# Altium PCB Pollux III.PcbDoc (part 3 of 3)
Units mm, origin at the board's own origin, x right, y up, seen from the top; angles counter-clockwise.
Board outline 123 x 84.5 mm, 4 copper layers (Top Layer, Ground Layer, Source Layer, Bottom Layer), stack 0.742 mm thick; 118 components, 107 nets, 741 pads, 375 vias.
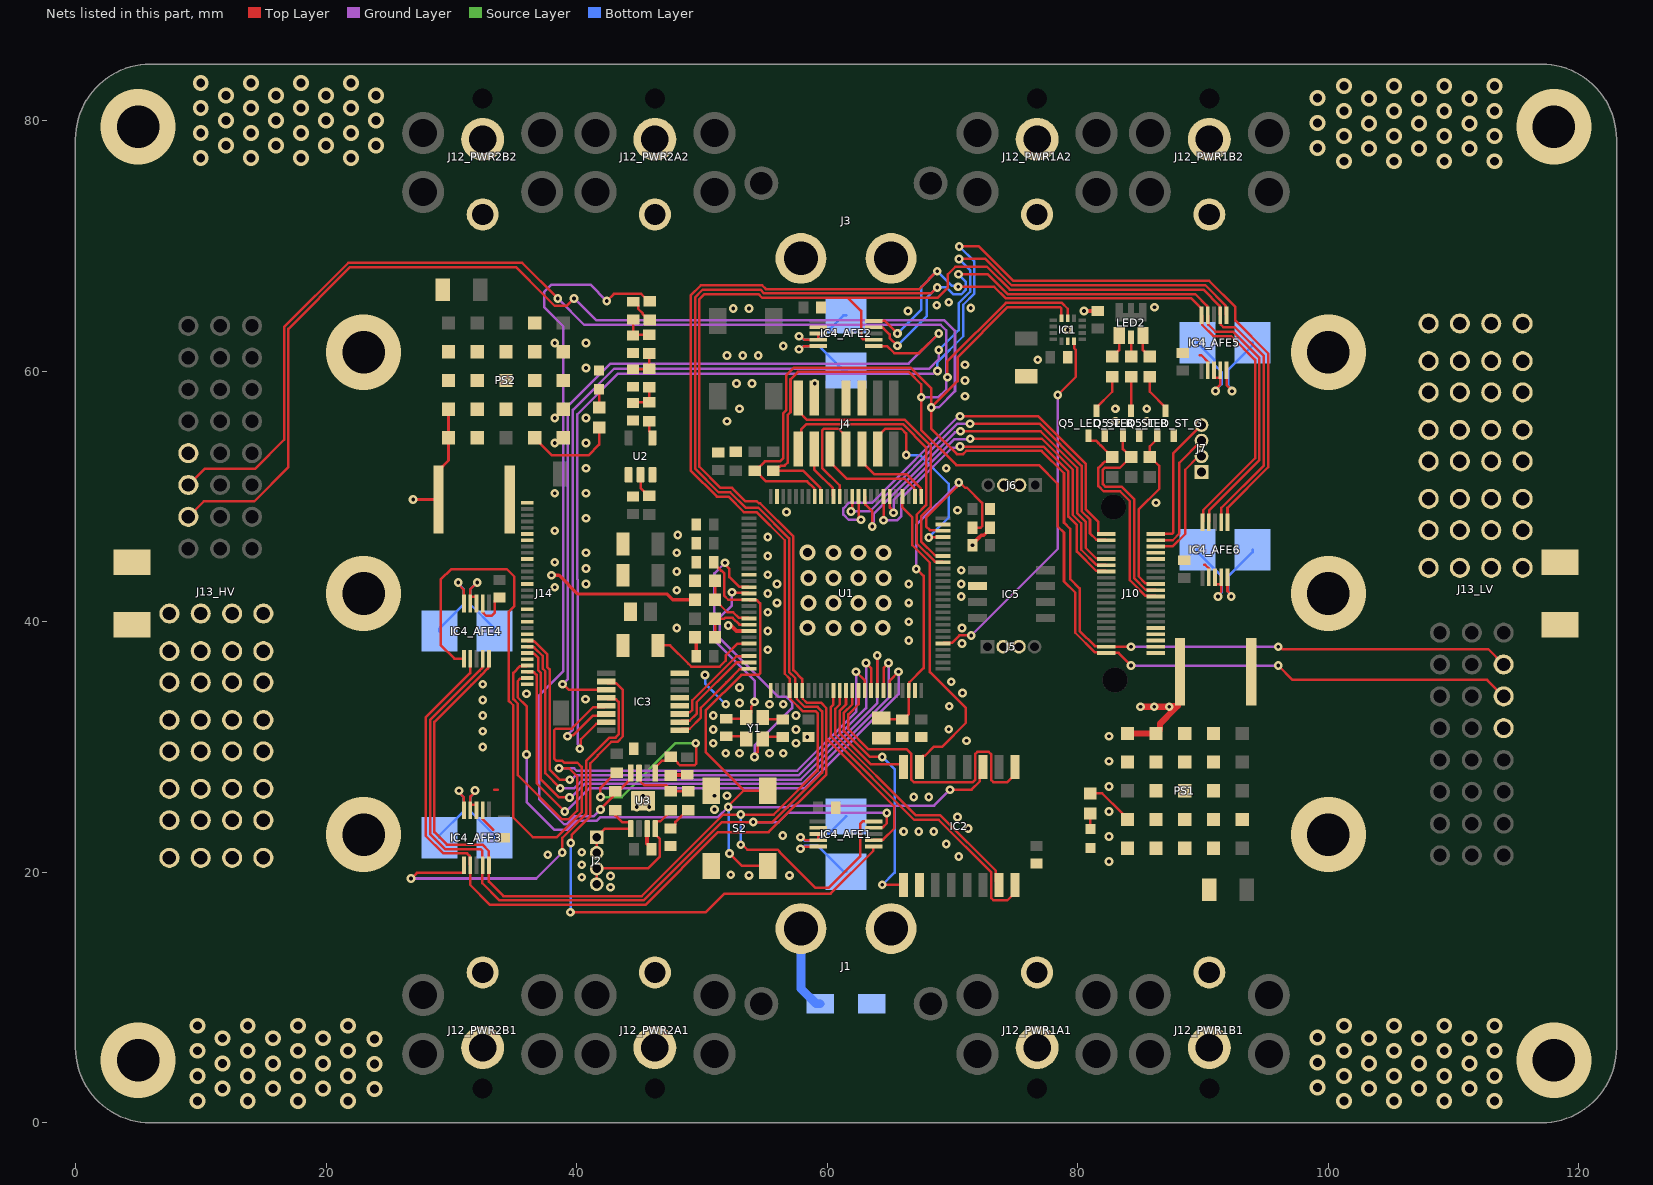
[diagram p4: the nets of this part, all layers, seen from the top]

## Via types
v1: diameter 0.7, hole 0.3, Top Layer to Bottom Layer, 237 vias
v2: diameter 1.27, hole 0.711, Top Layer to Bottom Layer, 128 vias
v3: diameter 6, hole 3.4, Top Layer to Bottom Layer, 10 vias

## Nets (pads, with @x,y where several pads share a name; then routed paths per layer and width w, separated by ;. In a path a pad name is that pad's centre, name@x,y a point inside that pad or via, vN(x,y) a via of type N, cw(c..) or ccw(c..) an arc to the next point about the centre after c; other vN are vias at no path point) (continued)
CAP: C4.1 C5.1 C9.2 U1.48 U1.73 | length 34.6
  Top Layer w0.2: C9.2@64.3,32.3 64.4,32.2 C5.1@66,32.2 ; C5.1@66.1,32.2 66.5,32.6 U1.48@66.5,34.5 66.55,34.55 66.55,35.154 67.696,36.3 67.696,43.65 67.146,44.2 v1(67.1,44.2) ; U1.73@69.25,47.25 69.2,47.3 68.2,47.3 67.9,47.6 67.9,48.306 70.337,50.744 70.337,50.802 70.5,50.965 v1(70.5,51.1) 70.592,51.1 71.006,50.686 71.147,50.686 72.36,49.474 72.36,47.617 72.243,47.5 C4.1@71.6,47.5 C4.1@71.35,47.25
  Ground Layer w0.2: v1(67.1,44.2) 67.1,47.7 v1(70.5,51.1)
CS1: IC3.15 IC4_AFE6.1 | length 115.6
  Top Layer w0.2: v1(40.24,29.86) 40.331,29.95 40.331,30.61 41.571,31.85 42.237,31.85 IC3.15@42.362,31.975 ; v1(70.539,69.95) 72.115,69.95 74.865,67.2 90.495,67.2 92.575,65.12 92.575,64.025 95.2,61.4 95.2,52.33 91.95,49.08 IC4_AFE6.1@91.95,47.95
  Ground Layer w0.2: v1(40.24,29.86) 40.145,29.955 40.145,30.182 40.1,30.227 40.1,43.318 40.05,43.368 40.05,56.55 43.3,59.8 68.465,59.8 68.665,60 v1(68.8,60)
  Bottom Layer w0.2: v1(68.8,60) 68.8,60.726 70.856,62.782 70.856,65.293 71.75,66.187 71.75,68.739 v1(70.539,69.95)
CS2: IC3.14 IC4_AFE5.1 | length 94
  Top Layer w0.2: v1(39.278,30.85) 39.351,30.924 39.724,30.924 41.3,32.5 42.237,32.5 IC3.14@42.362,32.625 ; v1(70.514,68.95) 72.62,68.95 74.72,66.85 90.179,66.85 91.825,65.204 91.825,64.5 IC4_AFE5.1@91.875,64.45
  Ground Layer w0.2: v1(39.278,30.85) 39.278,30.985 39.7,31.407 39.7,56.9 43,60.2 68.15,60.2 68.9,60.95 v1(68.9,61.675)
  Bottom Layer w0.2: v1(68.9,61.675) 70.5,63.275 70.5,65.432 71.4,66.332 71.4,68.064 v1(70.514,68.95)
CS3: IC3.13 IC4_AFE4.1 | length 53.8
  Top Layer w0.2: IC4_AFE4.1@31,37.05 30.25,37.05 29.15,38.15 29.15,43.35 30,44.2 34.425,44.2 35.04,43.585 35.04,41.245 34.6,40.805 34.6,33.666 34.94,33.326 34.94,24.356 36.496,22.8 38.419,22.8 40.4,24.781 40.4,28.4 40.05,28.75 38.999,28.75 38.84,28.909 38.359,28.909 38.2,29.067 38.2,31.333 38.317,31.45 39.601,31.45 41.324,33.173 42.26,33.173 IC3.13@42.362,33.275
CS4: IC3.12 IC4_AFE3.1 | length 33.2
  Top Layer w0.2: v1(26.775,19.5) 26.794,19.5 27.244,19.95 30.95,19.95 31,20 IC4_AFE3.1@31,20.55 ; v1(38.85,21.575) 38.85,22.736 40.75,24.636 40.75,28.884 42.616,30.75 43.103,30.75 43.35,30.996 43.35,33.604 43.153,33.8 42.487,33.8 IC3.12@42.362,33.925
  Ground Layer w0.2: v1(26.775,19.5) 36.775,19.5 v1(38.85,21.575)
CS5: IC3.11 IC4_AFE2.1 | length 64.1
  Top Layer w0.2: v1(38.872,35) 38.941,35 39.366,34.575 IC3.11@42.362,34.575 ; IC4_AFE2.1@63.7,62 64.781,62 65.351,61.43 67.33,61.43 v1(68.9,63)
  Ground Layer w0.2: v1(38.872,35) 39.3,35.428 39.3,57.2 42.7,60.6 66.5,60.6 v1(68.9,63)
CS6: IC3.10 IC4_AFE1.1 | length 48.2
  Top Layer w0.2: v1(39.5,16.8) 50.292,16.8 51.792,18.3 60.275,18.3 63.692,21.717 63.692,22 63.712,22.02 IC4_AFE1.1@63.995,22.02 ; v1(39.532,22.34) 39.596,22.404 39.596,22.987 41.1,24.491 41.1,28.7 41.7,29.3 41.7,29.339 42.761,30.4 43.248,30.4 43.7,30.851 43.7,34.554 43.153,35.1 42.487,35.1 IC3.10@42.362,35.225
  Bottom Layer w0.2: v1(39.5,16.8) 39.516,16.816 39.516,22.324 v1(39.532,22.34)
DCS: J14.4 U1.41 | length 51.3
  Top Layer w0.2: J14.4@36.05,36.5 36,36.45 35.496,36.45 34.95,35.904 34.95,33.811 35.3,33.461 35.3,27.751 38.839,24.212 39.336,24.212 40.05,24.926 40.05,27.65 39.4,28.3 v1(38.6,28.3) ; v1(62.3,36) 63,35.3 U1.41@63,34.5
  Ground Layer w0.2: v1(38.6,28.3) 39.8,28.3 40,28.1 57.6,28.1 62.3,32.8 v1(62.3,36)
DINT: J14.3 U1.45 | length 46.8
  Top Layer w0.2: J14.3@36.05,36 36.1,35.95 36.604,35.95 36.8,35.754 36.8,35.467 36.8,27.1 v1(39.051,24.849) ; U1.45@65,34.5 65,35.3 v1(65.7,36)
  Ground Layer w0.2: v1(39.051,24.849) 39.149,24.849 41,26.7 58.18,26.7 65.7,34.22 v1(65.7,36)
DMISO: J14.7 U1.43 | length 47.4
  Top Layer w0.2: J14.7@36.05,38 36.1,37.95 36.604,37.95 37.293,37.26 37.293,36.25 37.5,36.043 37.5,27.9 v1(38.7,26.7) ; U1.43@64,34.5 v1(64,37.3)
  Ground Layer w0.2: v1(38.7,26.7) 39.792,26.7 40.492,27.4 57.89,27.4 64,33.51 v1(64,37.3)
DMOSI: J14.6 U1.44 | length 47.6
  Top Layer w0.2: J14.6@36.05,37.5 36.1,37.45 36.604,37.45 36.943,37.11 36.943,36.105 37.15,35.899 37.15,27.401 38.577,25.974 v1(39.426,25.974) ; U1.44@64.5,34.5 64.5,36.3 v1(64.9,36.7)
  Ground Layer w0.2: v1(39.426,25.974) 39.561,25.974 40.637,27.05 58.035,27.05 64.9,33.915 v1(64.9,36.7)
DRX: J4.13 U1.69 | length 22.9
  Top Layer w0.2: J4.13@57.69,57.835 57.69,56.81 58.39,56.11 66.2,56.11 68.25,54.06 68.25,49.151 67.5,48.401 67.5,46.396 68.596,45.3 69.2,45.3 U1.69@69.25,45.25
DSCK: J14.8 U1.42 | length 45.3
  Top Layer w0.2: J14.8@36.05,38.5 36.1,38.45 36.604,38.45 37.643,37.41 37.643,36.395 37.85,36.188 37.85,28.201 38.676,27.376 v1(39.45,27.376) ; v1(63.1,36.7) 63.5,36.3 U1.42@63.5,34.5
  Ground Layer w0.2: v1(39.45,27.376) 39.585,27.376 39.96,27.75 57.745,27.75 63.1,33.105 v1(63.1,36.7)
DTX: J4.14 U1.68 | length 23.3
  Top Layer w0.2: J4.14@57.69,53.765 57.922,53.997 57.922,55.322 58.36,55.76 66.055,55.76 67.9,53.915 67.9,49.49 67.9,49.296 67.15,48.546 67.15,46.246 68.596,44.8 69.2,44.8 U1.68@69.25,44.75
FSYNC: IC1.7 U1.55 | length 29.5
  Top Layer w0.2: U1.55@69.25,38.25 69.3,38.3 69.951,38.3 70.551,38.9 v1(71.5,38.9) ; v1(78.4,58.1) 79.84,59.54 79.84,61.694 79.7,61.834 IC1.7@79.7,62.4
  Ground Layer w0.2: v1(71.5,38.9) 78.4,45.8 v1(78.4,58.1)
GND: C1.2 C2.2 C3.2 C4.2 C5.2 C6.1 C7.1 C8.1 C9.1 C10.1 C11.1 C12.2 C13.2 C14.2 C15.2 C16.2 C17.2 C18.2 C19.2 C20.2 C21.2 C22.2 C24.2 C25.2 C26_AFE1.1 C26_AFE2.1 C26_AFE3.1 C26_AFE4.1 C26_AFE5.1 C26_AFE6.1 C27.2 C28.2 C29.2 C30.1 C31.2 C32.2 C33.1 C34.2 C35.2 C36.2 D1.2 D2.1 D3.1 IC1.6 IC2.10 IC3.4 IC3.5 IC3.8 IC4_AFE1.7 IC4_AFE2.7 IC4_AFE3.7 IC4_AFE4.7 IC4_AFE5.7 IC4_AFE6.7 IC5.2 J1.2 J3.2 J4.5 J4.7 J4.11 J5.2 J5.3 J6.2 J6.3 J7.1 J10.32 J10.34 J10.36 J10.38 J10.40 J12_PWR1A1.2 J12_PWR1A2.2 J12_PWR1B1.2 J12_PWR1B2.2 J12_PWR2A1.2 J12_PWR2A2.2 J12_PWR2B1.2 J12_PWR2B2.2 J13_HV.P2 J13_HV.S20 J13_LV.P2 J13_LV.S20 J14.1 J14.5 J14.9 J14.11 J14.13 J14.17 J14.21 J14.24 J14.25 J14.30 PS1.A3 PS1.A4 PS1.B1 PS1.B2 PS1.B3 PS1.B4 PS1.C2 PS1.C3 PS1.C4 PS1.D2 PS1.D3 PS1.D4 PS1.D5 PS1.E1 PS1.E2 PS1.E3 PS1.E4 PS2.A3 PS2.A4 PS2.B1 PS2.B2 PS2.B3 PS2.B4 PS2.C2 PS2.C3 PS2.C4 PS2.D2 PS2.D3 PS2.D4 PS2.D5 PS2.E1 PS2.E2 PS2.E3 PS2.E4 Q5_LED_ST_B.2 Q5_LED_ST_G.2 Q5_LED_ST_R.2 R6.1 R10_DIV1.2 R10_DIV2.2 R15.1 S2.1 S2.2 U1.10 U1.19 U1.26 U1.49 U1.74 U1.99 U2.1 U2.3 U3.7 U3.9 Y1.2 Y1.4 | length 28.6
  Top Layer w0.2: IC4_AFE3.7@32.45,24.275 33.325,23.4 ; IC4_AFE4.7@32.473,40.773 32.786,40.461 33.214,40.461 33.46,40.706 33.46,41.635 33.75,41.925 C26_AFE4.1@33.85,41.925 ; 33.421,26.575 33.7,26.575 ; C7.1@51.95,30.85 53.35,30.85 Y1.2@53.55,30.65 ; Y1.4@54.85,32.35 55,32.2 C11.1@56.45,32.2 ; 89.725,61.275 89.854,61.275 IC4_AFE5.7@90.427,60.702 ; 90.081,44.541 90.163,44.541 IC4_AFE6.7@90.502,44.202
  Top Layer w0.3: U3.7@45.625,23.475 45.625,22.274 45.975,21.924 C29.2@45.975,21.824 ; R15.1@47.525,27.726 47.55,27.751 48.8,27.751 C30.1@48.825,27.776 ; R10_DIV2.2@49.45,38.75 49.55,38.65 C1.2@49.55,37.25 ; v1(52.1,39.7) 52.177,39.623 52.396,39.623 52.769,39.25 U1.19@53.75,39.25 ; v1(71.6,46.1) 71.6,46.2 72.11,46.71 72.114,46.71 72.294,46.89 72.49,46.89 73,47.4 C4.2@73,47.5 ; v1(80.5,64.8) C36.2@81.6,64.8
  Bottom Layer w0.2: v1(50.25,35.75) 50.25,35.05 v1(51.9,33.4)
  Bottom Layer w0.7: J1.2@57.9,15.5 57.9,10.725 59.125,9.5 D1.2@59.45,9.5
  other v1: 42.7,18.8 40.4,19.6 42.7,19.7 53.75,19.75 57,19.75 52.3,19.8 40.4,20.6 82.5,20.85 70.5,21.25 37.7,21.4 40.4,21.6 69.5,22.25 82.5,22.85 56.454,22.924 66.1,23.25 67.3,23.25 68.5,23.25 71.25,23.5 70.4,24.4 82.5,24.85 51,25 44.8,25.2 45.8,25.2 66.9,26 68.1,26 45.3,26.1 51,26.1 52,26.1 82.5,26.85 82.5,28.85 51.9,29.5 53,29.5 55.4,29.5 56.5,29.5 32.5,30 50.9,30.3 57.5,30.3 71.12,30.5 58.4,30.8 82.5,30.85 32.5,31.25 50.9,31.4 57.5,31.4 69.703,31.404 32.5,32.5 50.9,32.5 57.5,32.5 69.75,33.25 55.4,33.4 56.5,33.4 53,33.5 32.5,33.75 40.7,33.8 36,34.25 70.8,34.3 53,34.75 32.5,35 69.9,35.2 55.25,37.75 70.75,38.25 66.5,38.5 55.25,39.25 48,39.5 70.75,39.5 66.5,40 55.25,40.75 56,41.5 66.5,41.5 70.7,42 55.25,42.25 48,42.5 38.25,42.75 40.75,43 56,43 66.5,43 70.7,43 55.25,43.75 48,44 70.7,44.1 40.75,44.25 38.25,44.75 55.25,45.25 40.75,45.5 48,45.5 55.25,46.75 48.074,46.926 38.25,47.25 40.75,48.25 56.75,48.75 70.4,48.9 86.25,49.5 38.25,50.25 40.75,50.25 40.75,52.25 69.5,52.25 38.25,54.25 40.75,54.25 52,56 83,56 85.5,56 38.25,56.25 40.75,56.25 53,57 83,57 85.5,57 71,58 52.75,59 54,59 59,59 71,59.25 40.75,60.25 71,60.5 76.8,60.9 52,61.25 53.25,61.25 54.5,61.25 56.5,62 38.25,62.25 40.75,62.25 79.2,63.3 66.449,64.801 52.5,65 53.75,65 71.456,65.044 86.125,65.1 68.75,65.25 69.71,65.49
  other v3: 100,23 23,61.5
GPIO0: J7.4 J10.2 | length 11
  Top Layer w0.2: J10.2@86.225,47 87.508,47 87.625,47.117 87.625,53.45 J7.4@89.875,55.7
GPIO1: J7.3 J10.4 | length 10.3
  Top Layer w0.2: J10.4@86.225,46.5 87.578,46.5 88.1,47.022 88.1,52.675 J7.3@89.875,54.45
GPIO2: J7.2 J10.6 | length 9.6
  Top Layer w0.2: J10.6@86.225,46 87.573,46 88.575,47.002 88.575,52.125 89.65,53.2 J7.2@89.875,53.2
GPIO3: J10.8
GPIO4: J10.10
HSE_IN: C7.2 U1.12 Y1.1 | length 19.1
  Top Layer w0.2: v1(51.84,44.7) 51.84,44.565 52.2,44.205 52.2,43.56 52.96,42.8 53.7,42.8 U1.12@53.75,42.75 ; C7.2@51.95,32.25 53.45,32.25 53.95,32.75 53.95,33.215 54.2,33.465 v1(54.2,33.6)
  Ground Layer w0.2: v1(51.84,44.7) 51,43.86 51,38.5 54.2,35.3 v1(54.2,33.6)
HSE_OUT: C11.2 U1.13 Y1.3 | length 22.3
  Top Layer w0.2: v1(52.4,42.35) 52.45,42.3 53.7,42.3 U1.13@53.75,42.25 ; v1(54.2,29.2) 54.2,29.335 54.45,29.585 54.45,30.25 Y1.3@54.85,30.65 55,30.8 C11.2@56.45,30.8
  Ground Layer w0.2: v1(52.4,42.35) 52.4,41.302 51.416,40.318 51.416,38.684 56.1,34 56.75,34 57.1,33.65 57.1,33.649 57.2,33.549 57.2,33.1 54.2,30.1 v1(54.2,29.2)
HVA: IC4_AFE4.10 J13_HV.P4 R11_AFE4.1 | length 6.7
  Top Layer w0.2: v1(30.55,43.125) 30.55,42.99 31.001,42.539 IC4_AFE4.10@31.001,41.474
  Bottom Layer w0.2: R11_AFE4.1@29.05,39.25 29.05,39.45 31,41.4 31,42.583 30.55,43.033 v1(30.55,43.125)
  other v3: 23,42.25
HVB: IC4_AFE3.10 J13_HV.P1 R11_AFE3.1 | length 6.4
  Top Layer w0.2: v1(30.602,26.503) 30.602,26.38 31,25.982 IC4_AFE3.10@31,24.95
  Bottom Layer w0.2: R11_AFE3.1@29.05,22.75 29.05,22.95 31,24.9 31,25.982 30.602,26.38 v1(30.602,26.503)
  other v3: 23,23
JTCK: J4.6 U1.76 | length 7.2
  Top Layer w0.2: J4.6@62.77,53.765 62.77,52.74 63.74,51.77 66.334,51.77 67.45,50.654 67.45,50.05 U1.76@67.5,50
JTDI: J4.10 U1.77 | length 9.3
  Top Layer w0.2: J4.10@60.23,53.765 60.23,52.74 61.55,51.42 66.184,51.42 66.95,50.654 66.95,50.05 U1.77@67,50
JTDO: J4.8 U1.89 | length 9.1
  Top Layer w0.2: U1.89@61,50 61,50.876 59.6,52.276 59.6,55.254 59.756,55.41 60.704,55.41 60.714,55.4 60.89,55.4 61.5,54.79 J4.8@61.5,53.765
JTMS: J4.4 U1.72 | length 15.9
  Top Layer w0.2: J4.4@64.04,53.765 64.04,54.79 64.66,55.41 65.91,55.41 66.3,55.02 v1(66.3,53.3) ; v1(68.1,46.708) 68.121,46.729 69.229,46.729 U1.72@69.25,46.75
  Bottom Layer w0.2: v1(66.3,53.3) 67.4,53.3 69.7,51 69.7,48.325 68.1,46.725 v1(68.1,46.708)
JTRST: J4.12 U1.90 | length 4.4
  Top Layer w0.2: J4.12@58.96,53.765 58.96,52.14 59.678,51.422 59.682,51.422 60.45,50.654 60.45,50.05 U1.90@60.5,50
LVA: IC4_AFE6.10 J13_LV.P4 R11_AFE6.1 | length 6.3
  Top Layer w0.2: IC4_AFE6.10@91.95,43.55 91.95,42.435 92.25,42.135 v1(92.25,42)
  Bottom Layer w0.2: v1(92.25,42) 92.25,42.121 92,42.371 92,43.6 93.95,45.55 R11_AFE6.1@93.95,45.75
  other v3: 100,42.25
LVB: IC4_AFE5.10 J13_LV.P1 R11_AFE5.1 | length 6.6
  Top Layer w0.2: IC4_AFE5.10@91.875,60.05 91.875,58.894 92.3,58.469 v1(92.3,58.4)
  Bottom Layer w0.2: v1(92.3,58.4) 92.204,58.496 92.204,58.663 92,58.867 92,60.1 93.95,62.05 R11_AFE5.1@93.95,62.25
  other v3: 100,61.5
MISO: IC4_AFE1.4 IC4_AFE2.4 IC4_AFE3.4 IC4_AFE4.4 IC4_AFE5.4 IC4_AFE6.4 U1.30 | length 186.9
  Top Layer w0.2: IC4_AFE4.4@32.5,37.05 32.45,37 32.45,36.296 32.254,36.1 32.25,36.1 28.3,32.15 28.3,23.055 29.505,21.85 31.399,21.85 32.333,21.85 32.45,21.733 32.45,20.575 32.475,20.55 32.475,19.121 33.846,17.75 45.345,17.75 51.595,24 v1(54.1,24) 55.631,24 59.59,27.959 59.59,32.839 59.239,33.19 58.206,33.19 57.55,33.846 57.55,34.45 U1.30@57.5,34.5 57.45,34.55 57.45,35.117 57.45,35.495 56.959,35.986 56.959,46.64 54.499,49.1 53.485,49.1 52.26,50.325 51.346,50.325 49.45,52.221 49.45,65.885 50.065,66.5 54.661,66.5 54.961,66.2 68.3,66.2 v1(68.775,66.675) ; IC4_AFE1.4@63.7,23.55 63.75,23.6 64.454,23.6 64.75,23.896 v1(64.75,24.725) ; IC4_AFE2.4@63.7,63.5 63.75,63.45 64.454,63.45 64.975,62.928 64.975,62.655 v1(65.6,62.03) ; v1(70.475,67.725) 72.825,67.725 74.4,66.15 89.379,66.15 90.325,65.204 90.325,64.5 90.425,64.4 90.425,63.696 90.971,63.15 91.85,63.15 92.395,63.15 94.1,61.445 94.5,61.045 94.5,52.9 94.1,52.5 90.5,48.9 90.5,48 IC4_AFE6.4@90.45,47.95
  Ground Layer w0.2: v1(54.1,24) 56.134,24 56.884,24.75 64.725,24.75 v1(64.75,24.725)
  Bottom Layer w0.2: v1(65.6,62.03) 67.935,64.365 67.935,65.835 v1(68.775,66.675) 69.529,66.675 70.079,66.125 70.699,66.125 71.05,66.476 71.05,67.15 v1(70.475,67.725)
MOSI: IC4_AFE1.2 IC4_AFE2.2 IC4_AFE3.2 IC4_AFE4.2 IC4_AFE5.2 IC4_AFE6.2 U1.31 | length 180.9
  Top Layer w0.2: IC4_AFE4.2@31.5,37.05 31.5,35.9 27.95,32.35 27.95,22.91 29.36,21.5 31.254,21.5 31.45,21.304 31.45,20.6 IC4_AFE3.2@31.5,20.55 31.5,19 33.1,17.4 45.49,17.4 51.29,23.2 55.326,23.2 59.94,27.814 59.94,30.66 ; IC4_AFE1.2@63.7,22.55 63.75,22.6 64.454,22.6 65.35,23.496 65.35,25.25 59.94,30.66 ; IC4_AFE2.2@63.7,62.5 63.65,62.55 62.85,62.55 62.7,62.7 62.7,64.8 61.65,65.85 ; IC4_AFE6.2@91.45,48 91.45,49.075 94.85,52.475 94.85,61.19 92.54,63.5 91.621,63.5 91.425,63.696 91.425,64.4 91.325,64.5 91.325,65.204 90.029,66.5 74.575,66.5 72.75,68.325 70.226,68.325 69.633,67.731 69.633,66.684 68.799,65.85 61.65,65.85 ; 59.94,30.66 59.94,33.09 59.49,33.54 59.283,33.54 58.356,33.54 58.05,33.846 58.05,34.45 U1.31@58,34.5 58,35.44 57.309,36.131 57.309,46.785 54.643,49.45 54.533,49.45 54.383,49.6 53.48,49.6 52.405,50.675 51.491,50.675 49.8,52.366 49.8,65.74 50.21,66.15 54.516,66.15 54.816,65.85 61.65,65.85
NetC6_2: C6.2 U1.21 | length 9
  Top Layer w0.2: C6.2@46.5,38.1 47.466,38.1 48.91,36.656 49.166,36.4 51.415,36.4 51.9,36.885 51.9,37.3 52.85,38.25 U1.21@53.75,38.25
NetC23_1: C23.1 R12.1 | length 2.1
  Top Layer w0.2: C23.1@44.525,65.526 44.625,65.526 44.915,65.236 44.915,64.97 45.265,64.62 45.265,64.561 45.75,64.076 R12.1@45.825,64.076
NetC23_2: C23.2 C28.1 R5.1 | length 2.6
  Top Layer w0.2: C23.2@44.525,64.126 44.5,64.101 C28.1@44.5,62.85 44.55,62.9 R5.1@45.8,62.9
NetC24_1: C24.1 R3.1 R4.2 | length 2.5
  Top Layer w0.2: C24.1@44.5,57.45 44.55,57.5 R3.1@45.8,57.5 R4.2@45.8,58.7
NetC27_1: C27.1 R4.1 R5.2 | length 2.5
  Top Layer w0.2: C27.1@44.5,60.15 45.75,60.15 R4.1@45.8,60.2 R5.2@45.8,61.4
NetC33_2: C33.2 R22.2 | length 2.1
  Top Layer w0.2: C33.2@47.5,23.5 47.6,23.5 47.89,23.79 47.89,24.015 48.825,24.95 R22.2@48.9,24.95
NetD2_2: D2.2 R19.1 | length 1.3
  Top Layer w0.2: D2.2@81,23.45 R19.1@81,24.7
NetD3_2: D3.2 R1.1 | length 1.4
  Top Layer w0.2: R1.1@41.8,57.1 D3.2@41.8,58.55
NetF1_HV_2: F1_HV.2 J13_HV.P3
NetF1_LV_2: F1_LV.2 J13_LV.P3
NetJ2_1: J2.1 J2.2 R13.1 U3.5 | length 6.6
  Top Layer w0.2: J2.2@41.6,21.55 J2.1@41.6,22.8 42.275,23.475 U3.5@44.325,23.475 44.325,23.875 44.2,24.001 43.623,24.001 43.1,24.524 R13.1@43.1,24.95
NetJ2_3: J2.3 J2.4 R21.1 U3.8 | length 11.3
  Top Layer w0.2: J2.4@41.6,19.05 J2.3@41.6,20.3 45.684,20.3 46.615,21.23 46.615,22.685 46.275,23.025 U3.8@46.275,23.475 46.275,23.925 46.4,24.05 46.676,24.05 47.6,24.974 R21.1@47.675,24.974
NetJ10_18: J10.18 Q5_LED_ST_G.1 R20_LED_ST_G.2 | length 14.1
  Top Layer w0.2: J10.18@86.225,43 86.175,43.05 85.421,43.05 84.85,43.621 84.85,48.949 86.5,50.599 86.5,52.425 85.775,53.15 R20_LED_ST_G.2@85.75,53.15 85.75,54 86.35,54.6 Q5_LED_ST_G.1@86.35,54.85
NetJ10_20: J10.20 Q5_LED_ST_R.1 R20_LED_ST_R.2 | length 17.2
  Top Layer w0.2: Q5_LED_ST_R.1@83.6,54.85 83.6,53.775 R20_LED_ST_R.2@84.225,53.15 ; R20_LED_ST_R.2@84.25,53.15 R20_LED_ST_R.2@84.225,53.15 ; J10.20@86.225,42.5 86.175,42.55 85.421,42.55 84.5,43.471 84.5,49.775 83.516,50.759 82.213,50.759 82,50.971 82,52.129 82.146,52.275 83.35,52.275 R20_LED_ST_R.2@84.225,53.15
NetJ10_22: J10.22 Q5_LED_ST_B.1 R20_LED_ST_B.2 | length 17.6
  Top Layer w0.2: Q5_LED_ST_B.1@80.85,54.85 80.85,54.6 81,54.45 81.45,54.45 81.65,54.25 81.65,54.246 81.796,54.1 81.8,54.1 82.35,53.55 82.35,53.525 R20_LED_ST_B.2@82.725,53.15 ; R20_LED_ST_B.2@82.75,53.15 82.375,52.775 82.151,52.775 82.001,52.625 81.65,52.274 81.65,50.826 82.068,50.409 82.496,50.409 82.904,50.409 83.371,50.409 84.15,49.63 84.15,43.321 85.421,42.05 86.175,42.05 J10.22@86.225,42
NetLED2_4: LED2.4 R18.2 | length 1.9
  Top Layer w0.2: R18.2@82.75,61.15 82.775,61.15 83.3,61.675 LED2.4@83.3,62.851
NetLED2_5: LED2.5 R16.2 | length 1.6
  Top Layer w0.2: R16.2@84.25,61.15 LED2.5@84.25,62.701
NetLED2_6: LED2.6 R17.2 | length 1.9
  Top Layer w0.2: LED2.6@85.2,62.851 85.2,61.675 85.725,61.15 R17.2@85.75,61.15
NetPS1_D1: PS1.D1 R19.2 | length 3.9
  Top Layer w0.2: R19.2@81,26.3 81.95,26.3 83.53,24.72 83.53,24.64 PS1.D1@83.96,24.21
NetPS2_D1: PS2.D1 R1.2 | length 7.5
  Top Layer w0.2: PS2.D1@36.647,54.67 38.042,53.275 40.95,53.275 41.8,54.125 R1.2@41.8,55.5
NetQ5_LED_ST_B_3: Q5_LED_ST_B.3 R18.1 | length 3.2
  Top Layer w0.2: Q5_LED_ST_B.3@81.5,56.85 81.5,57.1 82.75,58.35 R18.1@82.75,59.55
NetQ5_LED_ST_G_3: Q5_LED_ST_G.3 R17.1 | length 3.2
  Top Layer w0.2: R17.1@85.75,59.55 85.75,58.35 87,57.1 Q5_LED_ST_G.3@87,56.85
NetQ5_LED_ST_R_3: Q5_LED_ST_R.3 R16.1 | length 2.7
  Top Layer w0.2: Q5_LED_ST_R.3@84.25,56.85 R16.1@84.25,59.55
NetR2_2: R2.2 U2.2 | length 2
  Top Layer w0.2: U2.2@45.1,51.725 45.1,50.675 45.725,50.05 R2.2@45.8,50.05
NetR3_2: R3.2 U2.4 | length 1.4
  Top Layer w0.2: R3.2@45.8,56 45.8,55.2 46.05,54.95 U2.4@46.05,54.675
NetR9_DIV1_2: R9_DIV1.2 R10_DIV1.1 U1.17 | length 4.8
  Top Layer w0.2: R10_DIV1.1@51.05,43.25 51.05,41.725 52.025,40.75 52.495,40.75 52.945,40.3 53.7,40.3 U1.17@53.75,40.25
NetR9_DIV2_2: R9_DIV2.2 R10_DIV2.1 U1.18 | length 4.4
  Top Layer w0.2: R10_DIV2.1@51.05,38.75 R9_DIV2.2@51.05,40.25 51.801,40.25 51.851,40.3 52.45,40.3 52.988,39.762 53.738,39.762 U1.18@53.75,39.75
NetR12_2: R12.2 R13.2 U3.4 | length 61.8
  Top Layer w0.2: v1(41.9,25) 41.9,25.05 44.325,27.475 U3.4@44.325,27.925 ; v1(42.4,65.6) 42.966,66.166 45.16,66.166 45.75,65.576 R12.2@45.825,65.576
  Ground Layer w0.2: v1(41.9,25) 41.35,24.45 39.817,24.45 39.178,23.811 39.012,23.811 37,25.823 37,34.1 38.95,36.05 38.95,63.55 37.4,65.1 37.4,66.318 37.982,66.9 41.1,66.9 v1(42.4,65.6)
NetR21_2: R21.2 R22.1 U3.3 | length 4.9
  Top Layer w0.2: U3.3@44.975,27.925 45.1,27.8 45.1,27.225 45.402,26.924 47.158,26.924 47.275,26.807 47.275,26.799 R21.2@47.562,26.512 ; R21.2@47.5,26.45 R22.1@48.9,26.45
NRST: C14.1 IC2.3 J14.2 S2.3 S2.4 U1.14 | length 86.7
  Top Layer w0.2: v1(36,29.4) 36,33.256 35.3,33.956 35.3,35.254 35.496,35.45 36,35.45 J14.2@36.05,35.5 ; C14.1@50.95,44.75 50.95,44.65 51.523,44.077 51.551,44.077 51.8,43.829 51.8,42.051 52.101,41.75 U1.14@53.75,41.75 53.8,41.7 54.404,41.7 54.65,41.454 54.65,35.867 54.533,35.75 53.15,35.75 50.3,32.9 50.3,29.6 53.4,26.5 ; v1(52.1,25.2) 52.1,25.3 53.3,26.5 53.4,26.5 ; v1(52.2,21.5) 53.2,20.5 S2.3@55.25,20.5 ; S2.4@55.25,26.5 53.4,26.5 ; v1(69.8,26.587) 71.519,26.587 72.19,27.259 72.19,28.15 IC2.3@72.44,28.4
  Ground Layer w0.2: v1(36,29.4) 36,25.6 38.222,23.378 39.24,23.378 39.962,24.1 41.6,24.1 41.9,24.4 51.3,24.4 v1(52.1,25.2) 56.839,25.2 56.964,25.325 68.538,25.325 v1(69.8,26.587)
  Bottom Layer w0.2: v1(52.1,25.2) 52.15,25.15 52.15,21.55 v1(52.2,21.5)
nSHDN: R14.2 R15.2 U3.1 | length 18
  Top Layer w0.2: v1(41.9,26) 41.9,26.725 43.125,27.95 R14.2@43.2,27.95 ; U3.1@46.275,27.925 46.275,28.375 46.801,28.901 47.2,28.901 R15.2@47.525,29.226 47.6,29.226 48.085,28.741 48.085,28.683 48.232,28.536 49.419,28.536 49.565,28.683 49.565,30.235 v1(49.5,30.3)
  Source Layer w0.2: v1(41.9,26) 43.6,26 47.9,30.3 v1(49.5,30.3)
OHVA: IC4_AFE4.8 IC4_AFE4.9 J12_PWR2A1.1 J12_PWR2A2.1 R11_AFE4.2 | length 7.3
  Top Layer w0.2: IC4_AFE4.9@31.55,41.4 IC4_AFE4.9@31.5,41.45 IC4_AFE4.9@31.5,41.925 ; IC4_AFE4.8@31.85,41.975 31.55,41.975 IC4_AFE4.9@31.5,41.925 ; v1(32.068,43.125) 31.5,42.557 IC4_AFE4.9@31.5,41.925
  Bottom Layer w0.2: v1(32.068,43.125) 32.043,43.125 31.508,42.59 31.508,41.392 33.45,39.45 R11_AFE4.2@33.45,39.25
OHVB: IC4_AFE3.8 IC4_AFE3.9 J12_PWR2B1.1 J12_PWR2B2.1 R11_AFE3.2 | length 6.8
  Top Layer w0.2: IC4_AFE3.9@31.5,24.95 31.5,25.325 IC4_AFE3.9@31.525,25.35 ; IC4_AFE3.9@31.5,25.599 31.5,26.003 31.881,26.384 v1(31.881,26.519) ; IC4_AFE3.9@31.525,25.599 IC4_AFE3.9@31.525,25.35 ; IC4_AFE3.8@31.85,25.375 31.55,25.375 IC4_AFE3.9@31.525,25.35
  Bottom Layer w0.2: v1(31.881,26.519) 31.881,26.384 31.508,26.011 31.508,24.892 33.45,22.95 R11_AFE3.2@33.45,22.75
OLVA: IC4_AFE6.8 IC4_AFE6.9 J12_PWR1A1.1 J12_PWR1A2.1 R11_AFE6.2 | length 6.7
  Top Layer w0.2: 91.125,42.975 91.4,42.975 IC4_AFE6.9@91.45,43.025 ; v1(91.2,42) 91.2,42.135 91.45,42.385 IC4_AFE6.9@91.45,43.025 ; IC4_AFE6.9@91.425,43.575 IC4_AFE6.9@91.45,43.55 IC4_AFE6.9@91.45,43.025
  Bottom Layer w0.2: R11_AFE6.2@89.55,45.75 89.55,45.55 90.9,44.2 91.492,43.608 91.492,42.367 91.2,42.075 v1(91.2,42)
OLVB: IC4_AFE5.8 IC4_AFE5.9 J12_PWR1B1.1 J12_PWR1B2.1 R11_AFE5.2 | length 7
  Top Layer w0.2: v1(91,58.405) 91,58.541 91.375,58.916 IC4_AFE5.9@91.375,59.525 ; 91.05,59.475 91.325,59.475 IC4_AFE5.9@91.375,59.525 ; IC4_AFE5.9@91.375,60.05 IC4_AFE5.9@91.375,59.525
  Bottom Layer w0.2: R11_AFE5.2@89.55,62.25 90.9,60.9 90.9,60.5 91.492,59.908 91.492,58.946 91,58.454 v1(91,58.405)
QSPI0: IC2.15 U1.37 | length 22.2
  Top Layer w0.2: U1.37@61,34.5 61,33.39 60.64,33.03 60.64,30.975 67.076,24.539 69.038,24.539 73.46,20.117 73.46,19.226 IC2.15@73.71,18.976
QSPI1: IC2.8 U1.38 | length 9.8
  Top Layer w0.2: U1.38@61.5,34.5 61.5,33.395 60.99,32.885 60.99,31.12 63.51,28.6 65.89,28.6 IC2.8@66.09,28.4
QSPI2: IC2.9 U1.39 | length 20.1
  Top Layer w0.2: U1.39@62,34.5 62,33.4 61.34,32.74 61.34,31.265 63.405,29.2 v1(64.4,29.2) ; v1(64.4,19) 66.066,19 IC2.9@66.09,18.976
  Bottom Layer w0.2: v1(64.4,19) 65.375,19.975 65.375,28.225 v1(64.4,29.2)
QSPI3: IC2.1 U1.40 | length 25
  Top Layer w0.2: U1.40@62.5,34.5 62.5,33.405 61.69,32.595 61.69,31.41 63.3,29.8 66.356,29.8 66.725,29.431 66.725,27.369 66.906,27.187 71.624,27.187 71.805,27.369 71.805,29.431 71.986,29.612 72.894,29.612 73.075,29.431 73.075,27.369 73.256,27.187 74.38,27.187 74.98,27.788 IC2.1@74.98,28.4
QSPICK: IC2.16 U1.36 | length 25.9
  Top Layer w0.2: U1.36@60.5,34.5 60.5,33.385 60.29,33.175 60.29,30.83 66.931,24.189 68.893,24.189 73.075,20.007 73.075,17.945 73.256,17.764 74.38,17.764 74.98,18.364 IC2.16@74.98,18.976
QSPICS: IC2.7 U1.79 | length 25.7
  Top Layer w0.2: U1.79@66,50 66,49.125 66.8,48.325 66.8,46.1 68.2,44.7 68.2,35.967 71.075,33.092 71.075,31.928 69.147,30 68.5,30 67.787,29.287 67.635,29.287 67.635,28.675 IC2.7@67.36,28.4
SBUS0: J10.1 U1.86 | length 34.6
  Top Layer w0.2: U1.86@62.5,50 62.5,48.335 v1(62.7,48.135) ; v1(70.6,56.4) 76.823,56.4 80.65,52.573 80.65,48.958 81.625,47.983 81.625,47.05 81.675,47 J10.1@82.275,47
  Ground Layer w0.2: v1(62.7,48.135) 61.716,48.135 61.3,48.551 61.3,49.049 61.751,49.5 63.6,49.5 70.5,56.4 v1(70.6,56.4)
SBUS1: J10.3 U1.87 | length 31.1
  Top Layer w0.2: v1(61.9,48.8) 62,48.9 U1.87@62,50 ; v1(71.4,55.8) 76.928,55.8 80.3,52.428 80.3,48.813 80.975,48.138 80.975,47.046 81.471,46.55 82.225,46.55 J10.3@82.275,46.5
  Ground Layer w0.2: v1(61.9,48.8) 63.395,48.8 70.395,55.8 v1(71.4,55.8)
SBUS4: J10.9 U1.85 | length 32.6
  Top Layer w0.2: U1.85@63,50 63.05,49.95 63.05,49.346 63.6,48.796 v1(63.6,47.6) ; v1(70.642,55.199) 70.644,55.2 77.033,55.2 79.95,52.283 79.95,48.668 80.625,47.993 80.625,45.896 81.471,45.05 82.225,45.05 J10.9@82.275,45
  Ground Layer w0.2: v1(63.6,47.6) 63.696,47.696 63.696,48.606 70.193,55.103 70.547,55.103 v1(70.642,55.199)
SBUS5: J10.11 U1.81 | length 29
  Top Layer w0.2: U1.81@65,50 65,49.1 65.3,48.8 v1(65.3,48.7) ; v1(71.412,54.6) 77.138,54.6 79.6,52.138 79.6,48.523 80.275,47.848 80.275,45.741 81.466,44.55 82.225,44.55 J10.11@82.275,44.5
  Ground Layer w0.2: v1(65.3,48.7) 65.3,49.715 70.163,54.578 71.391,54.578 v1(71.412,54.6)
SBUS6: J10.13 U1.82 | length 30.4
  Top Layer w0.2: v1(64.5,48.1) U1.82@64.5,50 ; v1(70.6,53.978) 77.265,53.978 79.25,51.993 79.25,48.378 79.925,47.703 79.925,45.596 81.471,44.05 82.225,44.05 J10.13@82.275,44
  Ground Layer w0.2: v1(64.5,48.1) 65.6,48.1 65.9,48.4 65.9,49.82 69.962,53.883 70.504,53.883 v1(70.6,53.978)
SCK: IC4_AFE1.5 IC4_AFE2.5 IC4_AFE3.5 IC4_AFE4.5 IC4_AFE5.5 IC4_AFE6.5 U1.29 | length 189
  Top Layer w0.2: IC4_AFE4.5@32.95,37.102 32.95,36.305 32.9,36.255 32.9,36.246 32.404,35.75 32.395,35.75 31.6,34.955 28.65,32.005 28.65,23.2 29.65,22.2 32.478,22.2 33,21.678 IC4_AFE3.5@33,20.55 33,19.25 34.15,18.1 45.2,18.1 51.7,24.6 v1(53.1,24.6) 55.736,24.6 56.086,24.95 59.24,28.104 59.24,32.694 59.094,32.84 58.056,32.84 57.05,33.846 57.05,34.45 U1.29@57,34.5 57,35.45 56.609,35.841 56.609,46.495 54.354,48.75 53.34,48.75 52.115,49.975 51.201,49.975 49.1,52.076 49.1,66.03 49.92,66.85 54.806,66.85 55.106,66.55 67.35,66.55 v1(68.775,67.975) ; v1(53.1,22.2) 53.219,22.2 53.619,21.8 56.054,21.8 56.2,21.654 56.2,21.605 59.055,18.75 60.1,18.75 62.65,21.3 62.65,23.875 62.825,24.05 IC4_AFE1.5@63.7,24.05 ; IC4_AFE2.5@63.7,64 64.6,64 v1(65.6,63) ; v1(70.45,66.725) 73.33,66.725 74.255,65.8 89.075,65.8 89.875,65 IC4_AFE5.5@89.875,64.45 89.925,64.4 89.925,63.696 90.821,62.8 92.25,62.8 94.15,60.9 94.15,53.045 90,48.895 90,48 IC4_AFE6.5@89.95,47.95
  Bottom Layer w0.2: v1(53.1,22.2) v1(53.1,24.6) ; v1(65.6,63) 67.525,64.925 67.525,66.725 v1(68.775,67.975) 69.929,66.821 70.354,66.821 v1(70.45,66.725)
SCL: IC1.13 J10.39 J13_HV.S19 J13_LV.S19 R7.2 U1.92 | length 185.4
  Top Layer w0.2: J13_HV.S19@9.01,50.91 10.3,52.2 14.328,52.2 16.65,54.522 16.65,63.519 21.781,68.65 35.65,68.65 v1(38.5,65.8) ; R7.2@55.7,52.05 R7.2@55.775,52.05 ; U1.92@59.5,50 59.45,50.05 59.45,50.654 58.054,52.05 R7.2@55.775,52.05 ; v1(67.51,57.91) v1@67.5,57.9 ; v1(69.6,59.5) 69.6,60.795 74.255,65.45 78.728,65.45 79.2,64.978 IC1.13@79.2,64.2 ; v1(84.25,36.5) 83.25,37.5 J10.39@82.275,37.5 82.225,37.55 81.368,37.55 79.8,39.118 79.8,42.317 78.9,43.217 78.9,47.1 78.4,47.6 78.4,51 76.9,52.5 70.305,52.5 67.5,55.305 v1@67.5,57.9 ; v1(96,36.5) 97.143,35.357 112.673,35.357 J13_LV.S19@113.99,34.04 ; R7.2@55.775,52.05 56.1,52.375 56.225,52.375 56.3,52.45 56.608,52.45 56.85,52.692 56.85,56.501 57.07,56.721 57.07,59.334 57.666,59.93 66.519,59.93 67.5,58.949 v1@67.5,57.9
  Ground Layer w0.2: v1(38.5,65.8) 40.6,63.7 69.049,63.7 69.5,63.249 69.5,58.551 68.849,57.9 67.519,57.9 v1(67.51,57.91) ; v1(84.25,36.5) v1(96,36.5)
SDA: IC1.14 J10.37 J13_HV.S18 J13_LV.S18 R8.2 U1.93 | length 192.7
  Top Layer w0.2: J13_HV.S18@9.01,48.37 10.24,49.6 14.268,49.6 17,52.332 17,63.374 21.926,68.3 35.151,68.3 37.453,65.999 38.251,65.2 39.2,65.2 v1(39.8,65.8) ; R8.2@54.2,52.05 R8.2@54.275,52.05 ; U1.93@59,50 58.95,50.05 58.95,50.654 58.404,51.2 55.125,51.2 R8.2@54.275,52.05 ; v1@68.3,57 68.3,55.43 70.351,53.378 70.849,53.378 71.099,53.628 77.12,53.628 78.9,51.849 78.9,47.9 79.4,47.4 79.4,43.4 80.15,42.65 80.15,39.263 81.363,38.05 82.225,38.05 J10.37@82.275,38 v1(84.25,38) ; IC1.14@78.7,64.2 78.7,64.983 78.583,65.1 74.4,65.1 70.4,61.1 70.4,59.2 v1(68.3,57.1) 68.3,58.643 66.664,60.28 57.356,60.28 56.72,59.644 56.72,56.866 56.5,56.646 56.5,53.071 56.229,52.8 55.025,52.8 R8.2@54.275,52.05 ; v1(96,38) 96.135,38 96.335,37.8 112.77,37.8 J13_LV.S18@113.99,36.58
  Ground Layer w0.2: v1(39.8,65.8) 39.839,65.8 41.589,64.05 69.35,64.05 70.2,63.2 70.2,58.4 68.9,57.1 v1@68.319,57.1 ; v1(84.25,38) v1(96,38)
SPI_A0: IC3.1 U1.25 | length 8
  Top Layer w0.2: IC3.1@48.238,31.325 48.363,31.45 49.029,31.45 49.926,32.346 49.926,33.13 51.945,35.15 52.995,36.2 53.7,36.2 U1.25@53.75,36.25
SPI_A1: IC3.2 U1.24 | length 8
  Top Layer w0.2: IC3.2@48.238,31.975 48.363,32.1 49.029,32.1 49.576,32.646 49.576,33.57 52.75,36.745 53.745,36.745 U1.24@53.75,36.75
SPI_A2: IC3.3 U1.23 | length 7.9
  Top Layer w0.2: IC3.3@48.238,32.625 48.363,32.75 49.029,32.75 49.226,32.946 49.226,33.715 52.75,37.24 53.74,37.24 U1.23@53.75,37.25
V_BAT: D1.1 IC4_AFE1.10 J1.1 R11_AFE1.1 | length 6
  Top Layer w0.2: v1(57.875,21.875) 58.01,21.875 58.185,22.05 IC4_AFE1.10@59.3,22.05
  Bottom Layer w0.2: v1@57.951,21.834 58.242,22.125 59.225,22.125 61.3,20.05 R11_AFE1.1@61.5,20.05
V_IN: C15.1 C31.1 F1_HV.1 F1_LV.1 IC4_AFE1.8 IC4_AFE1.9 IC4_AFE2.10 PS1.A1 PS1.A2 PS2.A1 PS2.A2 R9_DIV1.1 R11_AFE1.2 R11_AFE2.1 | length 50.5
  Top Layer w0.15: v3@115.25,79.75 v3@115.464,79.536 ; v3@117.7,79.3 117.3,78.9 v3@116.1,78.9 ; v3@115.464,79.536 v3@116.1,78.9 ; v3@115.464,79.536 115.464,78.936 115.888,78.512 116.012,78.512 116.1,78.6 v3@116.1,78.9
  Top Layer w0.2: v1(57.75,61.75) 57.885,61.75 58.135,62 IC4_AFE2.10@59.3,62 ; v1(57.875,22.793) 58.01,22.793 58.253,22.55 IC4_AFE1.9@59.3,22.55 IC4_AFE1.8@59.3,23.05
  Top Layer w0.254: v1@26.9,49.8 v1(26.95,49.75) C15.1@28.967,49.75 28.967,52.05 29.777,52.86 PS2.A1@29.777,54.67 PS2.A2@29.777,56.96 ; v1(38,43.7) 38.6,43.7 40.1,42.2 47.226,42.2 47.676,41.75 R9_DIV1.1@49.45,41.75
  Top Layer w0.5: PS1.A1@83.96,31.08 PS1.A2@86.25,31.08 86.563,31.393 86.563,31.863 87.701,33.001 ; v1(85,33.2) v1(86.1,33.2) v1(87.3,33.2) 87.338,33.238 87.845,33.238 87.9,33.293 87.995,33.293 ; 87.702,33 87.995,33.293 ; C31.1@88.15,36 87.995,35.845 87.995,33.293
  Bottom Layer w0.2: v1(57.75,61.75) 57.871,61.75 58.121,62 59.35,62 61.3,60.05 R11_AFE2.1@61.5,60.05 ; v1(57.875,22.793) 57.95,22.793 58.242,22.5 59.25,22.5 59.85,23.1 60.15,23.1 R11_AFE1.2@61.5,24.45
  other v2: 9.75,1.75 13.75,1.75 17.75,1.75 21.75,1.75 101.25,1.75 105.25,1.75 109.25,1.75 113.25,1.75 23.862,2.693 11.75,2.75 15.75,2.75 19.75,2.75 103.25,2.75 107.25,2.75 111.25,2.75 99.138,2.807 9.75,3.75 13.75,3.75 17.75,3.75 21.75,3.75 101.25,3.75 105.25,3.75 109.25,3.75 113.25,3.75 23.862,4.693 11.75,4.75 15.75,4.75 19.75,4.75 103.25,4.75 107.25,4.75 111.25,4.75 99.138,4.807 9.75,5.75 13.75,5.75 17.75,5.75 21.75,5.75 101.25,5.75 105.25,5.75 109.25,5.75 113.25,5.75 23.862,6.693 11.75,6.75 15.75,6.75 19.75,6.75 103.25,6.75 107.25,6.75 111.25,6.75 99.138,6.807 9.75,7.75 13.75,7.75 17.75,7.75 21.75,7.75 101.25,7.75 105.25,7.75 109.25,7.75 113.25,7.75 60.5,39.5 62.5,39.5 58.436,39.512 64.436,39.512 58.5,41.5 60.5,41.5 62.5,41.5 64.5,41.5 58.5,43.5 60.5,43.5 62.5,43.5 64.5,43.5 60.5,45.5 62.5,45.5 64.5,45.5 58.436,45.512 101.25,76.75 105.25,76.75 109.25,76.75 113.25,76.75 10,77 14,77 18,77 22,77 103.25,77.75 107.25,77.75 111.25,77.75 99.138,77.807 12,78 16,78 20,78 24,78 101.25,78.75 105.25,78.75 109.25,78.75 113.25,78.75 10,79 14,79 18,79 22,79 103.25,79.75 107.25,79.75 111.25,79.75 99.138,79.807 12,80 16,80 20,80 24,80 101.25,80.75 105.25,80.75 109.25,80.75 113.25,80.75 10,81 14,81 18,81 22,81 103.25,81.75 107.25,81.75 111.25,81.75 99.138,81.807 12,82 16,82 20,82 24,82 101.25,82.75 105.25,82.75 109.25,82.75 113.25,82.75 10,83 14,83 18,83 22,83
  other v3: 5,5 118,5 5,79.5 118,79.5
V_OUT: IC4_AFE2.8 IC4_AFE2.9 J3.1 R11_AFE2.2 | length 6.8
  Top Layer w0.2: v1(57.75,62.775) 57.885,62.775 58.16,62.5 IC4_AFE2.9@59.3,62.5 IC4_AFE2.8@59.3,63
  Bottom Layer w0.2: v1(57.75,62.775) 57.85,62.775 58.117,62.508 59.358,62.508 61.3,64.45 R11_AFE2.2@61.5,64.45
pads on no net: IC1.2 IC1.3 IC1.4 IC1.9 IC1.10 IC1.11 IC2.4 IC2.5 IC2.6 IC2.11 IC2.12 IC2.13 IC2.14 IC3.7 IC3.9 IC4_AFE1.3 IC4_AFE2.3 IC4_AFE3.3 IC4_AFE4.3 IC4_AFE5.3 IC4_AFE6.3 IC5.5 IC5.8 J1.3 J1.4 J3.3 J3.4 J4.1 J4.2 J4.9 J10. J10.5 J10.7 J10.12 J10.14 J10.15 J10.16 J10.17 J10.19 J10.21 J10.23 J10.24 J10.25 J10.27 J10.29 J10.31 J10.33 J10.35 J12_PWR1A1.MH1 J12_PWR1A1.MH2 J12_PWR1A1.MH3 J12_PWR1A1.MH4 J12_PWR1A1.MH5 J12_PWR1A2.MH1 J12_PWR1A2.MH2 J12_PWR1A2.MH3 J12_PWR1A2.MH4 J12_PWR1A2.MH5 J12_PWR1B1.MH1 J12_PWR1B1.MH2 J12_PWR1B1.MH3 J12_PWR1B1.MH4 J12_PWR1B1.MH5 J12_PWR1B2.MH1 J12_PWR1B2.MH2 J12_PWR1B2.MH3 J12_PWR1B2.MH4 J12_PWR1B2.MH5 J12_PWR2A1.MH1 J12_PWR2A1.MH2 J12_PWR2A1.MH3 J12_PWR2A1.MH4 J12_PWR2A1.MH5 J12_PWR2A2.MH1 J12_PWR2A2.MH2 J12_PWR2A2.MH3 J12_PWR2A2.MH4 J12_PWR2A2.MH5 J12_PWR2B1.MH1 J12_PWR2B1.MH2 J12_PWR2B1.MH3 J12_PWR2B1.MH4 J12_PWR2B1.MH5 J12_PWR2B2.MH1 J12_PWR2B2.MH2 J12_PWR2B2.MH3 J12_PWR2B2.MH4 J12_PWR2B2.MH5 J13_HV.S1 J13_HV.S2 J13_HV.S3 J13_HV.S4 J13_HV.S5 J13_HV.S6 J13_HV.S7 J13_HV.S8 J13_HV.S9 J13_HV.S10 J13_HV.S11 J13_HV.S12 J13_HV.S13 J13_HV.S14 J13_HV.S15 J13_HV.S16 J13_LV.S1 J13_LV.S2 J13_LV.S3 J13_LV.S4 J13_LV.S5 J13_LV.S6 J13_LV.S7 J13_LV.S8 J13_LV.S9 J13_LV.S10 J13_LV.S11 J13_LV.S12 J13_LV.S13 J13_LV.S14 J13_LV.S15 J13_LV.S16 J14.14 J14.15 J14.16 J14.18 J14.19 J14.20 J14.22 J14.23 J14.28 J14.29 J14.MP1 J14.MP2 PS1.C1 PS1.E5 PS2.C1 PS2.E5 U1.5 U1.7 U1.8 U1.9 U1.15 U1.16 U1.22 U1.28 U1.32 U1.33 U1.34 U1.35 U1.46 U1.47 U1.56 U1.57 U1.58 U1.59 U1.60 U1.61 U1.62 U1.63 U1.64 U1.65 U1.66 U1.67 U1.78 U1.80 U1.83 U1.84 U1.88 U1.91 U1.95 U1.96 U1.97 U1.98

## Polygon pours and split planes (outlines as drawn)
GND on Bottom Layer "GND_L04_P044" (solid, pour order 44): 28.5,18 26.5,20 26.5,64.5 28.5,66.5 94.5,66.5 96.5,64.5 96.5,20 94.5,18
OLVA on Bottom Layer "NONET_L-01_P-001" (solid, pour order 6): 71.75,0 81.75,0 81.75,84.5 71.75,84.5
OHVA on Bottom Layer "NONET_L-01_P-001" (solid, pour order 5): 41.25,0 51.25,0 51.25,84.5 41.25,84.5
GND on Bottom Layer "GND_L04_P001" (solid, pour order 1): 51.5,33.75 50.6,32.85 50.6,29.9 51.5,29 57,29 57.8,29.8 57.8,32.95 57,33.75
V_IN on Bottom Layer "Bottom Layer-V_IN" (solid, pour order 15): 53.5,29.5 60,23 63,23 69.5,29.5 69.5,40 69.5,55 63,61.5 60,61.5 53.5,55 53.5,44.5
OLVB on Bottom Layer "Bottom Layer-NetIC4_AFE5_8" (solid, pour order 9): 122.5,69.5 116.5,75.5 96.5,75.5 95.5,76.5 95.5,64.5 96.5,65.5 115.5,65.5 116.5,64.5 116.5,20 115.5,19 96.5,19 95.5,20 95.5,8 96.5,9 116.5,9 122.5,15
V_OUT on Bottom Layer "V_OUT_L04_P013" (solid, pour order 13): 53.5,84.5 69.5,84.5 69.5,69.5 63,63 60,63 53.5,69.5
V_BAT on Bottom Layer "V_BAT_L04_P010" (solid, pour order 10): 69.5,0 53.5,0 53.5,15 60,21.5 63,21.5 69.5,15
LVA on Bottom Layer "NONET_L-01_P-001" (solid, pour order 34): 116.5,43 96.5,43 95.25,44.25 95.25,47.25 96.5,48.5 116.5,48.5
LVB on Bottom Layer "NONET_L-01_P-001" (solid, pour order 25): 116.5,59.5 96.5,59.5 95.25,60.75 95.25,63.75 96.5,65 116.5,65
OHVB on Bottom Layer "Bottom Layer-NetIC4_AFE3_8" (solid, pour order 8): 0.5,15 6.5,9 26.5,9 27.5,8 27.5,20 26.5,19 7.5,19 6.5,20 6.5,64.5 7.5,65.5 26.5,65.5 27.5,64.5 27.5,76.5 26.5,75.5 6.5,75.5 0.5,69.5
OHVB on Bottom Layer "NONET_L-01_P-001" (solid, pour order 4): 27.5,0 37.5,0 37.5,84.5 27.5,84.5
OLVB on Bottom Layer "NONET_L-01_P-001" (solid, pour order 7): 85.5,0 95.5,0 95.5,84.5 85.5,84.5
OHVA on Bottom Layer "NONET_L-01_P-001" (solid, pour order 3): 51.25,36.5 36,36.5 34.75,37.75 34.75,40.75 36,42 51.25,42
OLVA on Bottom Layer "NONET_L-01_P-001" (solid, pour order 2): 71.75,48.5 87,48.5 88.25,47.25 88.25,44.25 87,43 71.75,43
HVA on Bottom Layer "NONET_L-01_P-001" (solid, pour order 17): 6,42 26.5,42 27.75,40.75 27.75,37.75 26.5,36.5 6,36.5
HVB on Bottom Layer "NONET_L-01_P-001" (solid, pour order 16): 6,25.5 26.5,25.5 27.75,24.25 27.75,21.25 26.5,20 6,20
V_BAT on Bottom Solder (solid): 53.75,0 69.25,0 69.25,2 ccw(c68.132,1.883) 68.25,3 62.75,3 ccw(c62.633,1.883) 62.75,3 54.75,3 ccw(c54.859,1.891) 53.75,2
OHVA on Bottom Solder "NONET_L-01_P-001" (solid): 51.25,84.5 51.25,82.5 cw(c50.141,82.609) 50.25,81.5 42.25,81.5 cw(c42.368,82.617) 41.25,82.5 41.25,84.5
V_OUT on Bottom Solder (solid): 69.25,84.5 53.75,84.5 53.75,82.5 ccw(c54.868,82.617) 54.75,81.5 60.25,81.5 ccw(c60.367,82.617) 60.25,81.5 68.25,81.5 ccw(c68.141,82.609) 69.25,82.5
OLVA on Bottom Solder "NONET_L-01_P-001" (solid): 71.75,0 71.75,2 cw(c72.859,1.891) 72.75,3 80.75,3 cw(c80.632,1.883) 81.75,2 81.75,0
OHVB on Bottom Solder "NONET_L-01_P-001" (solid): 37.5,84.5 37.5,82.5 cw(c36.391,82.609) 36.5,81.5 28.5,81.5 cw(c28.618,82.617) 27.5,82.5 27.5,84.5
OLVA on Bottom Solder "NONET_L-01_P-001" (solid): 81.75,84.5 81.75,82.5 cw(c80.641,82.609) 80.75,81.5 72.75,81.5 cw(c72.868,82.617) 71.75,82.5 71.75,84.5
OHVB on Bottom Solder "NONET_L-01_P-001" (solid): 27.5,0 27.5,2 cw(c28.609,1.891) 28.5,3 36.5,3 cw(c36.382,1.883) 37.5,2 37.5,0
OLVB on Bottom Solder "NONET_L-01_P-001" (solid): 85.5,0 85.5,2 cw(c86.609,1.891) 86.5,3 94.5,3 cw(c94.382,1.883) 95.5,2 95.5,0
OHVA on Bottom Solder "NONET_L-01_P-001" (solid): 41.25,0 41.25,2 cw(c42.359,1.891) 42.25,3 50.25,3 cw(c50.132,1.883) 51.25,2 51.25,0
OLVB on Bottom Solder "NONET_L-01_P-001" (solid): 95.5,84.5 95.5,82.5 cw(c94.391,82.609) 94.5,81.5 86.5,81.5 cw(c86.618,82.617) 85.5,82.5 85.5,84.5
GND on Top Layer "GND_L01_P021" (solid, pour order 21): 28.5,18 26.5,20 26.5,64.5 28.5,66.5 94.5,66.5 96.5,64.5 96.5,20 94.5,18
GND on Top Layer "GND_L01_P020" (solid, pour order 20): 51.5,33.75 50.6,32.85 50.6,29.9 51.5,29 57,29 57.8,29.8 57.8,32.95 57,33.75
V_IN on Top Layer "V_IN_L01_P033" (solid, pour order 33): 122.5,79 117.5,84 98.5,84 97.5,83 97.5,76.5 98.5,75.5 111.5,75.5 112.5,74.5 112.5,10 111.5,9 98.5,9 97.5,8 97.5,1.5 98.5,0.5 117.5,0.5 122.5,5.5 122.5,7
V_IN on Top Layer "V_IN_L01_P032" (solid, pour order 32): 0.5,5.5 5.5,0.5 24.5,0.5 25.5,1.5 25.5,8 24.5,9 11.5,9 10.5,10 10.5,74.5 11.5,75.5 24.5,75.5 25.5,76.5 25.5,83 24.5,84 5.5,84 0.5,79 0.5,77.5
NetF1_LV_2 on Top Layer "NETF1_LV_2_L01_P024" (solid, pour order 24): 117,44 117,49 101,49 100,50 100,53 101,54 118,54 120,52 120,44
NetF1_HV_2 on Top Layer "NETF1_HV_2_L01_P022" (solid, pour order 22): 6,40.5 6,36 22,36 23,35 23,32 22,31 4.5,31 3,32.5 3,40.5
GND on Top Layer "GND_L01_P040" (solid, pour order 40): 26.5,1.5 26.5,8 27.5,9 43.5,9 52,17.5 71,17.5 79.5,9 95.5,9 96.5,8 96.5,1.5 95.5,0.5 27.5,0.5
GND on Top Layer "GND_L01_P043" (solid, pour order 43): 96.5,83 96.5,76.5 95.5,75.5 75.5,75.5 67,67 56,67 47.5,75.5 27.5,75.5 26.5,76.5 26.5,83 27.5,84 95.5,84
GND on Ground Layer "Ground Layer-GND" (solid, pour order 31): 0.5,5.5 5.5,0.5 117.543,0.5 122.543,5.5 122.543,79 117.543,84 5.5,84 0.5,79
GND on Ground Layer "GND_L02_P030" (solid, pour order 30): 27,64.5 28.5,66 94.5,66 96,64.5 96,20 94.5,18.5 28.5,18.5 27,20
GND on Ground Layer "GND_L02_P028" (solid, pour order 28): 51.5,33.75 50.6,32.85 50.6,29.9 51.5,29 57,29 57.8,29.8 57.8,32.95 57,33.75
GND on Ground Layer "GND_L02_P045" (solid, pour order 45): 60,19 63,19 63,18 60,18
GND on Top Solder "NONET_L-01_P-001" (solid): 27.5,0 27.5,2 cw(c28.609,1.891) 28.5,3 36.5,3 cw(c36.382,1.883) 37.5,2 37.5,0
GND on Top Solder "NONET_L-01_P-001" (solid): 95.5,84.5 95.5,82.5 cw(c94.391,82.609) 94.5,81.5 86.5,81.5 cw(c86.618,82.617) 85.5,82.5 85.5,84.5
GND on Top Solder "NONET_L-01_P-001" (solid): 81.75,84.5 81.75,82.5 cw(c80.641,82.609) 80.75,81.5 72.75,81.5 cw(c72.868,82.617) 71.75,82.5 71.75,84.5
GND on Top Solder (solid): 69.25,84.5 53.75,84.5 53.75,82.5 ccw(c54.868,82.617) 54.75,81.5 60.25,81.5 ccw(c60.367,82.617) 60.25,81.5 68.25,81.5 ccw(c68.141,82.609) 69.25,82.5
no net on Top Solder "NONET_L-01_P-001" (solid): 51.25,84.5 51.25,82.5 cw(c50.141,82.609) 50.25,81.5 42.25,81.5 cw(c42.368,82.617) 41.25,82.5 41.25,84.5
GND on Top Solder "NONET_L-01_P-001" (solid): 37.5,84.5 37.5,82.5 cw(c36.391,82.609) 36.5,81.5 28.5,81.5 cw(c28.618,82.617) 27.5,82.5 27.5,84.5
GND on Top Solder "NONET_L-01_P-001" (solid): 85.5,0 85.5,2 cw(c86.609,1.891) 86.5,3 94.5,3 cw(c94.382,1.883) 95.5,2 95.5,0
GND on Top Solder "NONET_L-01_P-001" (solid): 71.75,0 71.75,2 cw(c72.859,1.891) 72.75,3 80.75,3 cw(c80.632,1.883) 81.75,2 81.75,0
GND on Top Solder (solid): 53.75,0 69.25,0 69.25,2 ccw(c68.132,1.883) 68.25,3 62.75,3 ccw(c62.633,1.883) 62.75,3 54.75,3 ccw(c54.859,1.891) 53.75,2
GND on Top Solder "NONET_L-01_P-001" (solid): 41.25,0 41.25,2 cw(c42.359,1.891) 42.25,3 50.25,3 cw(c50.132,1.883) 51.25,2 51.25,0
V_IN on Source Layer "V_IN_L03_P046" (solid, pour order 46): 5.5,84 0.5,79 0.5,5.5 5.5,0.5 117.5,0.5 122.5,5.5 122.5,79 117.5,84
GND on Source Layer "GND_L03_P026" (solid, pour order 26): 51.5,33.75 50.6,32.85 50.6,29.9 51.5,29 57,29 57.8,29.8 57.8,32.95 57,33.75

## Other copper
Top Layer:
  pour cut-out: 50.9,28.9 57.1,28.9 58,29.8 58,32.5 56.6,33.9 51.4,33.9 50.4,32.9 50.4,30.1 50.6,30.1 50.6,32.9 51.5,33.8 56.5,33.8 57.8,32.5 57.8,29.8 57,29 50.9,29

## Silkscreen, mask and mechanical layers (free items; w line width, h text height)
Top Overlay:
  drawing of 824 lines, arcs and shapes, not listed
  text "HVB" at 34.474,69.493 h3 r180
  text "HVA" at 48.299,69.493 h3 r180
  text "LVA" at 78.55,69.493 h3 r180
  text "LVB" at 92.225,69.493 h3 r180
  text "5V" at 35.75,65.766 h2
  text "Boot" at 52.012,65.766 h2
  text "LVB" at 104.007,63.225 h3 r270
  text "IMU" at 73.616,62.5 h2 r270
  text "GND" at 18.978,59.286 h3 r90
  text "CAN 2" at 76.703,57.487 h2 r180
  text "JTAG" at 67.186,54.212 h2 r90
  text "Ext" at 95.887,52.767 h2 r90
  text "Pollux III" at 58.818,50.916 h2
  text "Pre-Amplifier & Filter" at 48.809,50.7 h2 r90
  text "CAN" at 75.5,45.513 h2
  text "LVA" at 104.007,44.05 h3 r270
  text "HVA" at 18.993,40.201 h3 r90
  text "Castor Interconnect" at 80.384,35.771 h2 r90
  text "Mux" at 49.266,34.5 h2 r270
  text "Display" at 34.709,32.7 h2 r90
  text "CAN 1" at 72.796,31.513 h2
  text "Memory" at 76.291,29.016 h2 r270
  text "GND" at 104.022,25.214 h3 r270
  text "Speaker" at 35.291,23.629 h2 r270
  text "HVB" at 18.993,21.026 h3 r90
  text "Amp" at 43.8,19.791 h2
  text "3.3V" at 84.25,18.766 h2
  text "Reset" at 51.241,18.016 h2
  text "HVB" at 30.526,15.007 h3
  text "HVA" at 44.201,15.007 h3
  text "LVA" at 74.95,15.007 h3
  text "LVB" at 88.775,15.007 h3
Top Solder:
  text "LVPM" at 120.507,44.943 h3 r270
  text "HVPM" at 2.493,39.308 h3 r90
Bottom Solder:
  text "Power System V4" at 30.582,46.117 h4 r270
  text "Arion" at 80.023,39.645 h3 r270
  text "April 2023" at 43.437,37.226 h3 r270
  text "Pollux III" at 90.047,19.447 h6 r270
Mechanical 1:
  the board outline again, w0.254